# Altium PCB bms_afe_tester-1_1.PcbDoc (part 2 of 6)
Units mm, origin at the board's own origin, x right, y up, seen from the top; angles counter-clockwise.
Board outline 410 x 67 mm, 4 copper layers (L1, L2, L3, L4), stack 1.586 mm thick; 598 components, 356 nets, 1901 pads, 1542 vias.
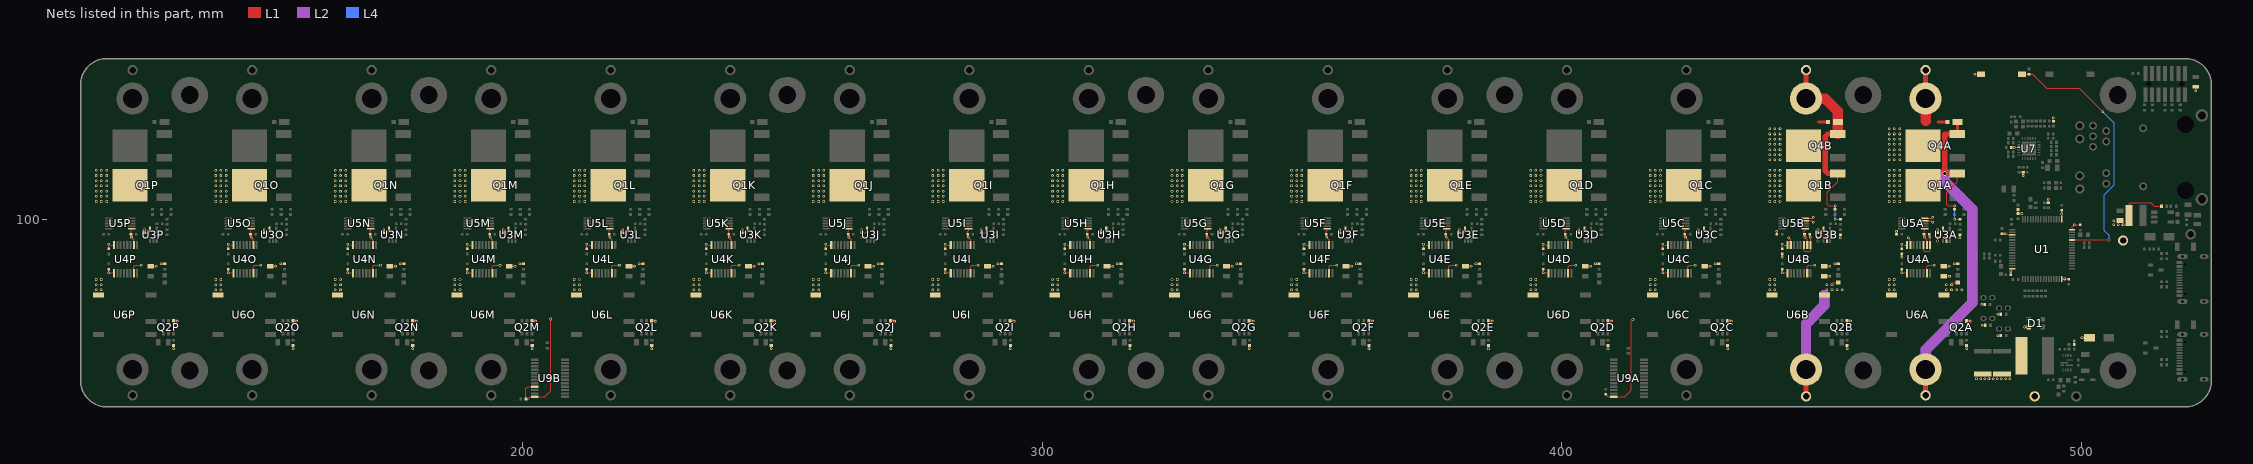
[diagram p4: the nets of this part, all layers, seen from the top]

## Components (designator, comment, footprint, x,y, rotation, side; value= is the part's Value field where it differs from the comment) (continued)
X3 "ABM11W-25.0000MHZ-8-D1X-T3" 4_SMD_2.0X1.6MM 488.1,118.4 r180 top

## Footprints (in the part's own frame and the unit in brackets; to place one, negate y for a bottom-side part, rotate by r counter-clockwise, add the part's x,y. Pads: shape width x height; smd on the part's side, far side on the other; paste and mask are expansions set on the pad)
3SOT23 [mm] "SOT23, 3-Leads, Body 3.0x2.6mm (max), Pitch 1.01mm, IPC High Density"
  rect 0.95x0.6 smd: 1(-1.025,0.95) 2(-1.025,-0.95) 3(1.025,0)
  silkscreen extent -1.17,-1.5 0.7,1.73, body extent -1.25,-1.5 1.25,1.5, height 1.01
4_SMD_2.0X1.6MM [mm]
  rect 0.75x0.7 smd: 1(-0.675,-0.5) 2(0.675,-0.5) 3(0.675,0.5) 4(-0.675,0.5)
  silkscreen extent -0.1,-0.8 0.1,0.8, body extent -1,-0.8 1,0.8, height 0.71
5SC70 [mm] "5SC70/SOT353-1/MO-203/SC-88A, 5-Leads, Body 2.2x2.4mm (max), Pitch 0.65mm, IPC High Density"
  rect 0.9x0.4 smd: 1(-1.1,0.65) 2(-1.1,0) 3(-1.1,-0.65) 4(1.1,-0.65) 5(1.1,0.65)
  silkscreen extent -1.14,-1.1 0.64,1.27, body extent -1.05,-1 1.05,1, height 0.95
5SOT23 [mm] "SOT23, 5-Leads, Body 2.9x2.8mm (max), Pitch 0.95mm, IPC High Density"
  rect 1.22x0.62 smd: 1(-1.61,0.95) 2(-1.61,0) 3(-1.61,-0.95) 4(1.61,-0.95) 5(1.61,0.95)
  silkscreen extent -1.27,-1.45 0.76,1.75, body extent -1.5,-1.5 1.5,1.5, height 1.46
6SOT23 [mm] "SOT23, 6-Leads, Body 2.9x2.8mm (max), Pitch 0.95mm, IPC High Density"
  rect 0.75x0.55 smd: 1(-1.225,0.95) 2(-1.225,0) 3(-1.225,-0.95) 4(1.225,-0.95) 5(1.225,0) 6(1.225,0.95)
  silkscreen extent -1.25,-1.45 0.63,1.5, body extent -1.5,-1.5 1.5,1.5, height 1.46
16SSOP635 [mm] "SOP, 16-Leads, Body 5.0x4.0mm (max), Pitch 0.64mm, IPC High Density"
  rect 1.55x0.4 smd: 1(-2.7,2.222) 2(-2.7,1.587) 3(-2.7,0.952) 4(-2.7,0.317) 5(-2.7,-0.318) 6(-2.7,-0.953) 7(-2.7,-1.588) 8(-2.7,-2.222) 9(2.7,-2.222) 10(2.7,-1.587) 11(2.7,-0.952) 12(2.7,-0.317) 13(2.7,0.318) 14(2.7,0.953) 15(2.7,1.588) 16(2.7,2.222)
  silkscreen extent -2.85,-2.5 1.6,3.05, body extent -3,-2.53 3,2.45, height 1.11
24QFN4E [mm] "QFN, 24-Leads, Body 4.1x4.1mm (max), Pitch 0.50mm, IPC High Density"
  oval 0.6x0.25 smd: 1(-1.95,1.25) 2(-1.95,0.75) 3(-1.95,0.25) 4(-1.95,-0.25) 5(-1.95,-0.75) 6(-1.95,-1.25) 13(1.95,-1.25) 14(1.95,-0.75) 15(1.95,-0.25) 16(1.95,0.25) 17(1.95,0.75) 18(1.95,1.25)
  oval 0.25x0.6 smd: 7(-1.25,-1.95) 8(-0.75,-1.95) 9(-0.25,-1.95) 10(0.25,-1.95) 11(0.75,-1.95) 12(1.25,-1.95) 19(1.25,1.95) 20(0.75,1.95) 21(0.25,1.95) 22(-0.25,1.95) 23(-0.75,1.95) 24(-1.25,1.95)
  rect 2.7x2.7 smd: EP(0,0)
  silkscreen extent -2.52,-2.05 2.05,2.05, body extent -2,-2 2,2, height 0.9
24TSSOP65 [mm] "TSOP, 24-Leads, Body 7.9x4.5mm (max), Pitch 0.65mm, IPC High Density"
  rect 1.5x0.45 smd: 1(-2.9,3.575) 2(-2.9,2.925) 3(-2.9,2.275) 4(-2.9,1.625) 5(-2.9,0.975) 6(-2.9,0.325) 7(-2.9,-0.325) 8(-2.9,-0.975) 9(-2.9,-1.625) 10(-2.9,-2.275) 11(-2.9,-2.925) 12(-2.9,-3.575) 13(2.9,-3.575) 14(2.9,-2.925) 15(2.9,-2.275) 16(2.9,-1.625) 17(2.9,-0.975) 18(2.9,-0.325) 19(2.9,0.325) 20(2.9,0.975) 21(2.9,1.625) 22(2.9,2.275) 23(2.9,2.925) 24(2.9,3.575)
  silkscreen extent -3.1,-3.9 1.9,4.3, body extent -3.2,-3.9 3.2,3.9, height 1.13
64TQFP10 [mm] "TSQFP, 64-Leads, Body 12.0x12.0mm (max), Pitch 0.50mm, IPC High Density"
  rect 1.2x0.3 smd: 1(-5.75,3.75) 2(-5.75,3.25) 3(-5.75,2.75) 4(-5.75,2.25) 5(-5.75,1.75) 6(-5.75,1.25) 7(-5.75,0.75) 8(-5.75,0.25) 9(-5.75,-0.25) 10(-5.75,-0.75) 11(-5.75,-1.25) 12(-5.75,-1.75) 13(-5.75,-2.25) 14(-5.75,-2.75) 15(-5.75,-3.25) 16(-5.75,-3.75) 33(5.75,-3.75) 34(5.75,-3.25) 35(5.75,-2.75) 36(5.75,-2.25) 37(5.75,-1.75) 38(5.75,-1.25) 39(5.75,-0.75) 40(5.75,-0.25) 41(5.75,0.25) 42(5.75,0.75) 43(5.75,1.25) 44(5.75,1.75) 45(5.75,2.25) 46(5.75,2.75) 47(5.75,3.25) 48(5.75,3.75)
  rect 0.3x1.2 smd: 17(-3.75,-5.75) 18(-3.25,-5.75) 19(-2.75,-5.75) 20(-2.25,-5.75) 21(-1.75,-5.75) 22(-1.25,-5.75) 23(-0.75,-5.75) 24(-0.25,-5.75) 25(0.25,-5.75) 26(0.75,-5.75) 27(1.25,-5.75) 28(1.75,-5.75) 29(2.25,-5.75) 30(2.75,-5.75) 31(3.25,-5.75) 32(3.75,-5.75) 49(3.75,5.75) 50(3.25,5.75) 51(2.75,5.75) 52(2.25,5.75) 53(1.75,5.75) 54(1.25,5.75) 55(0.75,5.75) 56(0.25,5.75) 57(-0.25,5.75) 58(-0.75,5.75) 59(-1.25,5.75) 60(-1.75,5.75) 61(-2.25,5.75) 62(-2.75,5.75) 63(-3.25,5.75) 64(-3.75,5.75)
  silkscreen extent -5.9,-5 5,5, body extent -6.01,-6.01 6.01,6.01, height 1.35
BELFUSE_0826-1L1T-57-F [mil]
  rect 0x0 hole 128: 0(-250,0) 0(250,0)
  round 60 hole 35: 1(-200,-600) 2(-120,-600) 5(120,-600) 6(200,-600) 7(-240,-700) 8(-160,-700) 9(-80,-700) 10(-220,-320) 11(220,-320)
  round 70 hole 40: 12(-240,-800) 13(-140,-800) 14(140,-800) 15(240,-800)
  round 94.49 hole 62: SHLD(-317.5,125) SHLD(317.5,125)
  silkscreen extent -318,-799 318,-80, body extent -374,-858 374,457, height 587
BOURNS_SRP7030CA [mm]
  rect 2.3x7.2 smd: 1(-2.55,0) 2(2.55,0)
  silkscreen extent -3.8,-3.9 3.8,3.9, body extent -3.8,-3.9 3.8,3.9, height 3
C0402 [mm]
  rect 0.5x0.5 smd: 1(-0.5,0) 2(0.5,0)
  silkscreen extent -0.13,-0.25 0.13,0.25, body extent -0.5,-0.25 0.5,0.25, height 0.6
C0603 [mm]
  rect 0.8x0.8 smd: 1(-0.75,0) 2(0.75,0)
  silkscreen extent -0.23,-0.4 0.23,0.4, body extent -0.8,-0.4 0.8,0.4, height 1
C0805 [mm]
  rect 0.9x1.3 smd: 1(-0.95,0) 2(0.95,0)
  silkscreen extent -0.38,-0.63 0.38,0.63, body extent -1,-0.63 1,0.63, height 1.45
C1206 [mm]
  rect 0.9x1.6 smd: 1(-1.55,0) 2(1.55,0)
  silkscreen extent -0.98,-0.8 0.97,0.8, body extent -1.6,-0.8 1.6,0.8, height 1.9
C1812 [mm]
  rect 0.9x3.4 smd: 1(-2.2,0) 2(2.2,0)
  silkscreen extent -1.63,-1.6 1.62,1.6, body extent -2.25,-1.6 2.25,1.6, height 3.5
CONN_USBC_TYPE-C-31-M-12 [mm] "USB 2.0 12P USB-C connector"
  oval 0.9x2 hole 0.6 slot 1.7 at 90 deg: 0(-4.325,6.29) 0(4.325,6.29)
  oval 0.9x1.7 hole 0.6 slot 1.4 at 90 deg: 0(-4.325,2.11) 0(4.325,2.11)
  rect 0.6x1.14 smd: A1(-3.2,6.86) A4(-2.4,6.86) B1(3.2,6.86) B4(2.4,6.86)
  rect 0.3x1.14 smd: A5(-1.25,6.86) A6(-0.25,6.86) A7(0.25,6.86) A8(1.25,6.86) B5(1.75,6.86) B6(0.75,6.86) B7(-0.75,6.86) B8(-1.75,6.86)
  round 0 hole 0.6: GP(-2.89,5.79) GP(2.89,5.79)
  silkscreen extent -4.5,3.3 4.5,7.8, body extent -4.47,-0.46 4.47,7.44, height 3.22
ESMP [mm]
  rect 0.8x0.8 smd: 1(0.65,0)
  rect 2x1.1 smd: 2(-1.25,0)
  silkscreen extent -2.44,-0.6 0.75,0.6, body extent -1.58,-0.65 0.92,0.65, height 0.68
FB0402 [mm]
  rect 0.55x0.55 smd: 1(-0.45,0) 2(0.45,0)
  silkscreen extent -0.05,-0.28 0.05,0.28, body extent -0.5,-0.25 0.5,0.25, height 0.65
FB0805 [mm]
  rect 0.81x1.4 smd: 1(-0.85,0) 2(0.85,0)
  silkscreen extent -0.33,-0.62 0.33,0.63, body extent -1,-0.63 1,0.63, height 1.1
HALO_DC21 [mm]
  rect 2.1x1 smd: 1(-5.05,3.81) 2(-5.05,1.27) 4(-5.05,-3.81) 5(5.05,-3.81) 8(5.05,3.81)
  silkscreen extent -5.6,-6.35 5.6,6.35, body extent -5.7,-6.35 5.7,6.35, height 7.25
HOLE_M3 [mm]
  round 7 hole 3.4: 1(0,0)
LED_0603P_GREEN [mm]
  rect 0.8x0.85 smd: 1(0.7,0) 2(-0.7,0)
  silkscreen extent -1.4,-0.33 0.1,0.33, body extent -0.81,-0.4 0.81,0.4, height 0.6
LED_RGB_SMD3528-4P [mm]
  rect 0.9x0.9 smd: 1(1.35,-0.75) 2(-1.35,-0.75) 3(1.35,0.75) 4(-1.35,0.75)
  silkscreen extent -1.6,-1.5 2.3,1.5, body extent -1.75,-1.4 1.75,1.4, height 1.9
R0402 [mm]
  rect 0.5x0.6 smd: 1(-0.5,0) 2(0.5,0)
  silkscreen extent -0.13,-0.25 0.13,0.25, body extent -0.5,-0.25 0.5,0.25, height 0.5
R0805 [mm]
  rect 0.7x1.3 smd: 1(-0.95,0) 2(0.95,0)
  silkscreen extent -0.48,-0.63 0.48,0.63, body extent -1,-0.63 1,0.63, height 0.75
SAMTEC_FTSH-107-01-L-DV-K-A [mil]
  rect 0x0 hole 40 unplated: 0(-125,0) 0(125,0)
  rect 29x110 smd: 1(-150,-80) 2(-150,80) 3(-100,-80) 4(-100,80) 5(-50,-80) 6(-50,80) 7(0,-80) 8(0,80) 9(50,-80) 10(50,80) 11(100,-80) 12(100,80) 13(150,-80) 14(150,80)
  silkscreen extent -201,-106 177,59, body extent -175,-115 175,115, height 242
SINHOO_SMTSO20100CTJ [mm]
  round 6.2 smd: 1(0,0)
  round 5 hole 3.7: 1(0,0)
  body extent -2.78,-2.76 2.78,2.78, height 10.01
SMA [mm] "Molded Diode, 2-Leads, Body 4.3x2.6mm, IPC High Density"
  rect 2.1x1.45 smd: 1(-1.85,0) 2(1.85,0)
  silkscreen extent -2.3,-1.5 3.08,1.5, body extent -2.6,-1.3 2.6,1.3, height 2.4
SMD-4.1x4.1x2.0 [mm]
  rect 1.4x4.1 smd: 1(-1.35,0) 2(1.35,0)
  silkscreen extent -0.5,-2 0.5,2, body extent -2,-2 2,2, height 2
SOD323 [mm] "Molded Diode, 2-Leads, Body 1.7x1.3mm, IPC High Density"
  rect 1.06x0.54 smd: 1(1.07,0) 2(-1.07,0)
  silkscreen extent -1.31,-0.75 0.9,0.75, body extent -1.35,-0.67 1.35,0.68, height 0.78
SWITCH_TS-1092S-B3D2-G [mm]
  rect 1.5x1 smd: 1(-3.95,0) 2(3.95,0)
  silkscreen extent -3.05,-1.8 3.05,1.8, body extent -3.95,-1.8 3.95,1.8, height 2.5
TI_DGS [mm]
  rect 1.45x0.3 smd: 1(-2.2,1) 2(-2.2,0.5) 3(-2.2,0) 4(-2.2,-0.5) 5(-2.2,-1) 6(2.2,-1) 7(2.2,-0.5) 8(2.2,0) 9(2.2,0.5) 10(2.2,1)
  silkscreen extent -2.3,-1.5 1.5,1.6, body extent -2.43,-1.5 2.49,1.5, height 1.11
TI_RJN [mm]
  rect 1.4x0.25 smd: 1(-0.5,0.5) 2(-0.5,-0.5) 7(0.5,0)
  rect 0.25x0.6 smd: 3(-0.75,-1.4) 4(-0.25,-1.4) 5(0.25,-1.4) 6(0.75,-1.4) 9(0.75,1.4) 10(0.25,1.4) 11(-0.25,1.4) 12(-0.75,1.4)
  rect 0.6x0.25 smd: 8(0.9,0.5)
  silkscreen extent -1.44,-1.4 1.12,1.4, body extent -1,-1.5 1,1.5, height 1.01
TO-252-3 [mm]
  rect 1.5x3 smd: 1(-2.286,-6.6) 3(2.286,-6.6)
  rect 6.25x6.8 smd: 4(0,0)
  silkscreen extent -3.4,-8.3 3.4,3.6, body extent -3.3,-7.35 3.3,2.55, height 2.51
TP_GRABBY [mm]
  rrect100% 1.2x1 hole 0.65 slot 0.9 at 0 deg: 1(-0.856,0) 1(0.844,0)
  silkscreen extent -1.65,-0.69 1.62,0.69
TP_RH-5000 [mm]
  round 2 hole 1.25: 1(0,0)
  silkscreen extent -1.25,-1.25 1.25,1.25, body extent -1.25,-1.24 1.25,1.24, height 4.59
TP_RH-5001 [mm]
  round 2 hole 1.25: 1(0,0)
  silkscreen extent -1.25,-1.25 1.25,1.25, body extent -1.25,-1.24 1.25,1.24, height 4.59

## Part data
C1 C2: Capacitance="2.2 µF", Dielectric=X7R, Manufacturer="Murata Electronics", Package=0603, Voltage Rating="6.3 V", ComponentLink1Description=Datasheet, ComponentLink1URL=https://wmsc.lcsc.com/wmsc/upload/file/pdf/v2/lcsc/1810311130_Murata-Electronics-GCM188R70J225KE22D_C126582.pdf, Manufacturer Part Number=GCM188R70J225KE22D, Supplier 2=LCSC, Supplier Part Number 2=C126582
C3 C4 C5 C6A C6B C7 C8 C9 C20A C20B C20C C20D C20E C20F C20G C20H C20I C20J C20K C20L C20M C20N C20O C20P C24A C24B C24C C24D C24E C24F C24G C24H C24I C24J C24K C24L C24M C24N C24O C24P C25A C25B C25C C25D C25E C25F C25G C25H C25I C25J C25K C25L C25M C25N C25O C25P C26A C26B C26C C26D C26E C26F C26G C26H C26I C26J C26K C26L C26M C26N C26O C26P C27A C27B C27C C27D C27E C27F C27G C27H C27I C27J C27K C27L C27M C27N C27O C27P C28 C30 C36 C39 C49 C56: Capacitance="100 nF", Dielectric=X7R, Manufacturer="Samsung Electro-Mechanics", Package=0402, Voltage Rating="50 V", ComponentLink1Description=Datasheet, ComponentLink1URL=https://wmsc.lcsc.com/wmsc/upload/file/pdf/v2/lcsc/2304140030_Samsung-Electro-Mechanics-CL05B104KB54PNC_C307331.pdf, Manufacturer Part Number=CL05B104KB54PNC, Supplier 2=LCSC, Supplier Part Number 2=C307331
C10 C12 C18 C31 C47 C50: Capacitance="1 µF", Dielectric=X7R, Manufacturer="Samsung Electro-Mechanics", Package=0603, Voltage Rating="25 V", ComponentLink1Description=Datasheet, ComponentLink1URL=https://wmsc.lcsc.com/wmsc/upload/file/pdf/v2/lcsc/2304140030_Samsung-Electro-Mechanics-CL10B105KA8NNNC_C29936.pdf, Manufacturer Part Number=CL10B105KA8NNNC, Supplier 2=LCSC, Supplier Part Number 2=C29936
C13 C48: Capacitance="10 µF", Dielectric=X7R, Manufacturer=YAGEO, Package=0805, Voltage Rating="6.3 V", ComponentLink1Description=Datasheet, ComponentLink1URL=https://wmsc.lcsc.com/wmsc/upload/file/pdf/v2/lcsc/2409272300_YAGEO-CC0805KKX7R5BB106_C527225.pdf, Manufacturer Part Number=CC0805KKX7R5BB106, Supplier 2=LCSC, Supplier Part Number 2=C527225
C14 C51: Capacitance="27 pF", Dielectric=NP0, Manufacturer=YAGEO, Package=0402, Voltage Rating="50 V", ComponentLink1Description=Datasheet, ComponentLink1URL=https://wmsc.lcsc.com/wmsc/upload/file/pdf/v2/lcsc/2304140030_YAGEO-CC0402JRNPO9BN270_C107002.pdf, Manufacturer Part Number=CC0402JRNPO9BN270, Supplier 2=LCSC, Supplier Part Number 2=C107002
C15 C16: Capacitance="6 pF", Dielectric=NP0, Manufacturer=YAGEO, Package=0402, Voltage Rating="50 V", ComponentLink1Description=Datasheet, ComponentLink1URL=https://wmsc.lcsc.com/wmsc/upload/file/pdf/v2/lcsc/2007101237_YAGEO-CC0402CRNPO9BN6R0_C700515.pdf, Manufacturer Part Number=CC0402CRNPO9BN6R0, Supplier 2=LCSC, Supplier Part Number 2=C700515
C17 C19 C22A C22B C22C C22D C22E C22F C22G C22H C22I C22J C22K C22L C22M C22N C22O C22P C23A C23B C23C C23D C23E C23F C23G C23H C23I C23J C23K C23L C23M C23N C23O C23P: Capacitance="10 µF", Dielectric=X7R, Manufacturer="Samsung Electro-Mechanics", Package=0805, Voltage Rating="16 V", ComponentLink1Description=Datasheet, ComponentLink1URL=https://wmsc.lcsc.com/wmsc/upload/file/pdf/v2/lcsc/2304140030_Samsung-Electro-Mechanics-CL21B106KOQNNNE_C95841.pdf, Manufacturer Part Number=CL21B106KOQNNNE, Supplier 2=LCSC, Supplier Part Number 2=C95841
C21A C21B C21C C21D C21E C21F C21G C21H C21I C21J C21K C21L C21M C21N C21O C21P: Capacitance="68 pF", Dielectric=C0G, Manufacturer=KEMET, Package=0402, Voltage Rating="25 V", ComponentLink1Description=Datasheet, ComponentLink1URL=https://wmsc.lcsc.com/wmsc/upload/file/pdf/v2/lcsc/2401181509_KEMET-CBR04C680F3GAC_C3831342.pdf, Manufacturer Part Number=CBR04C680F3GAC, Supplier 2=LCSC, Supplier Part Number 2=C3831342
C29 C80A C80B: Capacitance="10 µF", Dielectric=X7R, Manufacturer="Samsung Electro-Mechanics", Package=1206, Voltage Rating="50 V", ComponentLink1Description=Datasheet, ComponentLink1URL=https://wmsc.lcsc.com/wmsc/upload/file/pdf/v2/lcsc/1810221111_Samsung-Electro-Mechanics-CL31B106KBHNNNE_C89632.pdf, Manufacturer Part Number=CL31B106KBHNNNE, Supplier 2=LCSC, Supplier Part Number 2=C89632
C32 C33: Capacitance="33 µF", Dielectric=X7R, Manufacturer=TDK, Package=1812, Voltage Rating="16 V", ComponentLink1Description=Datasheet, ComponentLink1URL=https://wmsc.lcsc.com/wmsc/upload/file/pdf/v2/lcsc/2304140030_TDK-C4532X7R1C336MT000N_C342604.pdf, Manufacturer Part Number=C4532X7R1C336MT000N, Supplier 2=LCSC, Supplier Part Number 2=C342604
C34A C34B C35A C35B: Capacitance="330 pF", Dielectric=C0G, Manufacturer="Samsung Electro-Mechanics", Package=0402, Voltage Rating="50 V", ComponentLink1Description=Datasheet, ComponentLink1URL=https://wmsc.lcsc.com/wmsc/upload/file/pdf/v2/lcsc/2304140030_Samsung-Electro-Mechanics-CL05C331JB5NNNC_C13533.pdf, Manufacturer Part Number=CL05C331JB5NNNC, Supplier 2=LCSC, Supplier Part Number 2=C13533
C52 C53: Capacitance="10 pF", Dielectric=C0G, Manufacturer="Samsung Electro-Mechanics", Package=0402, Voltage Rating="50 V", ComponentLink1Description=Datasheet, ComponentLink1URL=https://wmsc.lcsc.com/wmsc/upload/file/pdf/v2/lcsc/2304140030_Samsung-Electro-Mechanics-CL05C100JB5NNNC_C32949.pdf, Manufacturer Part Number=CL05C100JB5NNNC, Supplier 2=LCSC, Supplier Part Number 2=C32949
D1: "LED Multi-Color Chip Red/Green/Blue 4-Pin PLCC T/R", LED Color=RGB, Manufacturer=XINGLIGHT, Supplier Part Number 1=5962-XL-3528RGBW-HMTR-ND, ComponentLink1Description=Datasheet, ComponentLink1URL=https://mm.digikey.com/Volume0/opasdata/d220001/medias/docus/8903/XL-3528RGBW-HM.pdf, Manufacturer Part Number=XL-3528RGBW-HM, Supplier 1=DigiKey, Supplier 2=LCSC, Supplier Part Number 2=C2843813
D2 D6: "Rectifier Diode, Schottky, 1 Phase, 1 Element, 3A, 40V V(RRM), Silicon", Current="3 A", Manufacturer=Diodes, Supplier Part Number 1=B340A-FDICT-ND, ComponentLink1Description=Datasheet, ComponentLink1URL=https://www.diodes.com/assets/Datasheets/ds30891.pdf, Diode Type=Schottky, Manufacturer Part Number=B340A-13-F, Supplier 1=DigiKey, Supplier 2=LCSC, Supplier 3=Mouser, Supplier Part Number 2=C85098, Supplier Part Number 3=621-B340A-F, Vr="40 V"
D4A D4B D4C D4D D4E D4F D4G D4H D4I D4J D4K D4L D4M D4N D4O D4P: "LED GREEN CLEAR 0603 SMD", LED Color=Green, Manufacturer="Lite-On Inc", Supplier Part Number 1=160-1183-1-ND, ComponentLink1Description=Datasheet, ComponentLink1URL=https://static.chipdip.ru/lib/459/DOC011459654.pdf, If="20 mA", Manufacturer Part Number=LTST-C190GKT, Supplier 1=DigiKey, Supplier 2=LCSC, Supplier 3=Mouser, Supplier Part Number 2=C125093, Supplier Part Number 3=859-LTST-C190GKT, Vf="2.0 V"
D5: "Zener Diode 5.1 V 300 mW ±2% Surface Mount SOD-323", Current="58.8 mA", Manufacturer=onsemi, Supplier Part Number 1=SZMM3Z5V1ST1GOSCT-ND, ComponentLink1Description=Datasheet, ComponentLink1URL=https://www.onsemi.com/pdf/datasheet/mm3z2v4st1-d.pdf, Diode Type=Zener, Manufacturer Part Number=SZMM3Z5V1ST1G, Supplier 1=DigiKey, Supplier 2=LCSC, Supplier 3=Mouser, Supplier Part Number 2=C152524, Supplier Part Number 3=863-SZMM3Z5V1ST1G, Vr="5.1 V"
D8A D8B D8C D8D D8E D8F D8G D8H D8I D8J D8K D8L D8M D8N D8O D8P: "DIODE SCHOTTKY 20V 2A MICROSMP", Current="2 A", Manufacturer="Vishay Semiconductor Diodes Division", Supplier Part Number 1=MSS2P2-M3/89AGICT-ND, ComponentLink1Description=Datasheet, ComponentLink1URL=http://www.vishay.com/docs/89054/mss2p3.pdf, Diode Type=Schottky, Manufacturer Part Number=MSS2P2-M3/89A, Supplier 1=DigiKey, Supplier 2=LCSC, Supplier 3=Mouser, Supplier Part Number 2=C2978531, Supplier Part Number 3=625-MSS2P2-M3, Vr="20 V"
D17A D17B: "DIODE ESD USB SOT-23", Capacitance (pF)=0.7, Manufacturer="Nexperia USA Inc.", Min Breakdown Voltage="4.2 V", Supplier Part Number 1=1727-PESD2USB3UX-CT-ND, ComponentLink1Description=Datasheet, ComponentLink1URL=https://assets.nexperia.com/documents/data-sheet/PESD2USB3UX-T.pdf, Manufacturer Part Number=PESD2USB3UX, Polarity=Unidirectional, Standoff (V)=3.3, Supplier 1=DigiKey, Supplier 2=LCSC, Supplier 3=Mouser, Supplier Part Number 2=C3708426, Supplier Part Number 3=771-PESD2USB3UX-TR
FB1 FB3: Current Rating (mA)=900, Manufacturer="Murata Electronics", Package=0402, ComponentLink1Description=Datasheet, ComponentLink1URL=https://wmsc.lcsc.com/wmsc/upload/file/pdf/v2/lcsc/2304140030_Murata-Electronics-BLM15PX601SN1D_C160977.pdf, DCR (mOhms)=230, Manufacturer Part Number=BLM15PX601SN1D, Supplier 2=LCSC, Supplier Part Number 2=C160977, Z @ 100 MHz=600
FB2: Current Rating (mA)=1500, Manufacturer=TDK, Package=0805, ComponentLink1Description=Datasheet, ComponentLink1URL=https://wmsc.lcsc.com/wmsc/upload/file/pdf/v2/lcsc/2304140030_TDK-MPZ2012S102AT000_C76817.pdf, DCR (mOhms)=150, Manufacturer Part Number=MPZ2012S102AT000, Supplier 2=LCSC, Supplier Part Number 2=C76817, Z @ 100 MHz=1000
H1 H2 H3 H4 H5 H6 H7 H8 H9 H10 H11 H12 H13 H14 H15 H16 H17 H18 H19 H20 H21 H22 H23 H24 H25 H26 H27 H28 H29 H30 H31 H32: "Standoff M2 x 0.4, tin-plated, 10 mm height", Manufacturer=Sinhoo, ComponentLink1Description=Catalog, ComponentLink1URL=https://www.lcsc.com/datasheet/C2928171.pdf, Manufacturer Part Number=SMTSO20100CTJ, Supplier 2=LCSC, Supplier Part Number 2=C2928171
J1: "Connector Header Surface Mount 14 position 0.050\" (1.27mm)", Manufacturer=Samtec, Supplier Part Number 1=FTSH-107-01-L-DV-K-A-ND, ComponentLink1Description=Datasheet, ComponentLink1URL=https://mm.digikey.com/Volume0/opasdata/d220001/medias/docus/6209/ftsh-1xx-xx-xxx-dv-xxx-xxx-x-xx-mkt.pdf, Manufacturer Part Number=FTSH-107-01-L-DV-K-A, Supplier 1=DigiKey, Supplier 2=LCSC, Supplier 3=Mouser, Supplier Part Number 2=C5563894, Supplier Part Number 3=200-FTSH10701LDVKA
J2: "CONN MAGJACK 1PORT 100 BASE-T", Manufacturer="Bel Fuse Inc", Supplier Part Number 1=507-1431-ND, ComponentLink1Description=Datasheet, ComponentLink1URL=https://www.belfuse.com/resources/drawings/magneticsolutions/dr-mag-0826-1l1t-57-f.pdf, Manufacturer Part Number=0826-1L1T-57-F, Supplier 1=DigiKey, Supplier 2=LCSC, Supplier 3=Mouser, Supplier Part Number 2=C3179913, Supplier Part Number 3=530-0826-1L1T-57-F
J11A J11B: "5A 1 16P Female Type-C SMD USB Connectors ROHS", Manufacturer="HRO Electronics", ComponentLink1Description="Product page", ComponentLink1URL=https://en.krhro.com/Product-Details/726.html, ComponentLink2Description=Drawing, ComponentLink2URL=https://omo-oss-file.thefastfile.com/portal-saas/new2023011311465142457/cms/file/95f41c83-14fa-41cb-9f86-8d6a717317e5.pdf, Manufacturer Part Number=TYPE-C-31-M-12, Supplier 2=LCSC, Supplier Part Number 2=C165948
L1: "4.7 µH SMD power inductor", Current Rating (mA)=5000, Inductance (µH)=4.7, Manufacturer=cjiang, ComponentLink1Description=Datasheet, ComponentLink1URL=https://www.lcsc.com/datasheet/C39676072.pdf, DCR (mOhms)=58, Manufacturer Part Number=FTC404020S4R7MGCA, Supplier 2=LCSC, Supplier Part Number 2=C39676072
L2: "2.2 µH shielded power inductor", Current Rating (mA)=13000, Inductance (µH)=2.2, Manufacturer=BOURNS, Supplier Part Number 1=SRP7030CA-2R2MCT-ND, ComponentLink1Description=Datasheet, ComponentLink1URL=https://www.bourns.com/docs/product-datasheets/SRP7030CA.pdf, DCR (mOhms)=13.7, Manufacturer Part Number=SRP7030CA-2R2M, Supplier 1=DigiKey, Supplier 2=LCSC, Supplier 3=Mouser, Supplier Part Number 2=C1332137, Supplier Part Number 3=652-SRP7030CA-2R2M
Q1A Q1B Q1C Q1D Q1E Q1F Q1G Q1H Q1I Q1J Q1K Q1L Q1M Q1N Q1O Q1P: "NPN power transistor, 30 V, 5 A, low VCE(sat), TO-252-3", Current="5 A", Manufacturer="ROHM Semiconductor", Supplier Part Number 1=2SCR572D3TL1CT-ND, Voltage="30 V", ComponentLink1Description=Datasheet, ComponentLink1URL=https://fscdn.rohm.com/en/products/databook/datasheet/discrete/transistor/bipolar/2scr572d3tl1-e.pdf, Manufacturer Part Number=2SCR572D3TL1, Polarity=NPN, Supplier 1=DigiKey, Supplier 2=LCSC, Supplier 3=Mouser, Supplier Part Number 2=C3018572, Supplier Part Number 3=755-2SCR572D3TL1
Q2A Q2B Q2C Q2D Q2E Q2F Q2G Q2H Q2I Q2J Q2K Q2L Q2M Q2N Q2O Q2P: "MOSFET P-CH 20V 4.5A SSOT-6", Current="4.5 A", Manufacturer=onsemi, Supplier Part Number 1=FDC638PCT-ND, Voltage="20 V", Channel Type=P-channel, ComponentLink1Description=Datasheet, ComponentLink1URL=https://www.onsemi.com/pdf/datasheet/fdc638p-d.pdf, Manufacturer Part Number=FDC638P, Supplier 1=DigiKey, Supplier 2=LCSC, Supplier 3=Mouser, Supplier Part Number 2=C241772, Supplier Part Number 3=512-FDC638P
Q4A Q4B Q4C Q4D Q4E Q4F Q4G Q4H Q4I Q4J Q4K Q4L Q4M Q4N Q4O Q4P: "PNP power transistor, 30 V, 5 A, low VCE(sat), TO-252-3", Current="5 A", Manufacturer="ROHM Semiconductor", Supplier Part Number 1=2SAR572D3TL1CT-ND, Voltage="30 V", ComponentLink1Description=Datasheet, ComponentLink1URL=https://fscdn.rohm.com/en/products/databook/datasheet/discrete/transistor/bipolar/2sar572d3tl1-e.pdf, Manufacturer Part Number=2SAR572D3TL1, Polarity=PNP, Supplier 1=DigiKey, Supplier 2=LCSC, Supplier 3=Mouser, Supplier Part Number 2=C5336541, Supplier Part Number 3=755-2SAR572D3TL1
R1 R8 R51: Manufacturer=FOJAN, Package=0402, Power Rating (mW)=62.5, Temperature Coefficient=±100ppm/?, Tolerance=1%, ComponentLink1Description=Datasheet, Supplier 2=LCSC
  R1: ComponentLink1URL=https://datasheet.lcsc.com/lcsc/2308241947_FOJAN-FRC0402F2670TS_C2998075.pdf, Manufacturer Part Number=FRC0402F2670TS, Supplier Part Number 2=C2998075
  R8: ComponentLink1URL=https://datasheet.lcsc.com/lcsc/2308241947_FOJAN-FRC0402F4532TS_C2933099.pdf, Manufacturer Part Number=FRC0402F4532TS, Supplier Part Number 2=C2933099
  R51: ComponentLink1URL=https://datasheet.lcsc.com/lcsc/2308241009_FOJAN-FRC0402F8202TS_C2909388.pdf, Manufacturer Part Number=FRC0402F8202TS, Supplier Part Number 2=C2909388
R2: Manufacturer=RALEC, Package=0402, Power Rating (mW)=62.5, Temperature Coefficient=±100ppm/?, Tolerance=1%, ComponentLink1Description=Datasheet, ComponentLink1URL=https://wmsc.lcsc.com/wmsc/upload/file/pdf/v2/lcsc/2304140030_RALEC-RTT029760FTH_C11710.pdf, Manufacturer Part Number=RTT029760FTH, Supplier 2=LCSC, Supplier Part Number 2=C11710
R3 R4 R6 R22 R26 R28 R29 R31 R32 R33 R35 R36 R37 R38 R40 R41 R46A R46B R81 R82 R91 R92 R93: Manufacturer="Vishay Intertech", Package=0402, Power Rating (mW)=63, Temperature Coefficient=±100ppm/?, Tolerance=1%, ComponentLink1Description=Datasheet, ComponentLink1URL=https://wmsc.lcsc.com/wmsc/upload/file/pdf/v2/lcsc/2304140030_Vishay-Intertech-CRCW040233R0FKED_C242490.pdf, Manufacturer Part Number=CRCW040233R0FKED, Supplier 2=LCSC, Supplier Part Number 2=C242490
R5 R10 R12A R12B R13A R13B R14A R14B R14C R14D R14E R14F R14G R14H R14I R14J R14K R14L R14M R14N R14O R14P R15 R21 R24 R25 R27 R30 R34 R39 R42A R42B R42C R42D R42E R42F R42G R42H R42I R42J R42K R42L R42M R42N R42O R42P R44A R44B R44C R44D R44E R44F R44G R44H R44I R44J R44K R44L R44M R44N R44O R44P R45 R49 R50 R52 R53A R53B R53C R53D R53E R53F R53G R53H R53I R53J R53K R53L R53M R53N R53O R53P R54 R55A R55B R55C R55D R55E R55F R55G R55H R55I R55J R55K R55L R55M R55N R55O R55P R56 R83 R87 R88 R89 R90 R95 R96 R97 R98: Manufacturer="UNI-ROYAL(Uniroyal Elec)", Package=0402, Power Rating (mW)=62.5, Temperature Coefficient=±100ppm/?, Tolerance=1%, ComponentLink1Description=Datasheet, Supplier 2=LCSC
  R5 R45: ComponentLink1URL=https://wmsc.lcsc.com/wmsc/upload/file/pdf/v2/lcsc/2206010100_UNI-ROYAL-Uniroyal-Elec-0402WGF1003TCE_C25741.pdf, Manufacturer Part Number=0402WGF1003TCE, Supplier Part Number 2=C25741
  R10 R14A R14B R14C R14D R14E R14F R14G R14H R14I R14J R14K R14L R14M R14N R14O R14P R30 R44A R44B R44C R44D R44E R44F R44G R44H R44I R44J R44K R44L R44M R44N R44O R44P R53A R53B R53C R53D R53E R53F R53G R53H R53I R53J R53K R53L R53M R53N R53O R53P R83 R95 R98: ComponentLink1URL=https://wmsc.lcsc.com/wmsc/upload/file/pdf/v2/lcsc/2206010100_UNI-ROYAL-Uniroyal-Elec-0402WGF1002TCE_C25744.pdf, Manufacturer Part Number=0402WGF1002TCE, Supplier Part Number 2=C25744
  R12A R12B R13A R13B: ComponentLink1URL=https://wmsc.lcsc.com/wmsc/upload/file/pdf/v2/lcsc/2206010045_UNI-ROYAL-Uniroyal-Elec-0402WGF5101TCE_C25905.pdf, Manufacturer Part Number=0402WGF5101TCE, Supplier Part Number 2=C25905
  R15 R50: ComponentLink1URL=https://wmsc.lcsc.com/wmsc/upload/file/pdf/v2/lcsc/2206010100_UNI-ROYAL-Uniroyal-Elec-0402WGF4702TCE_C25792.pdf, Manufacturer Part Number=0402WGF4702TCE, Supplier Part Number 2=C25792
  R21 R27 R34 R49 R52 R54: ComponentLink1URL=https://wmsc.lcsc.com/wmsc/upload/file/pdf/v2/lcsc/2206010045_UNI-ROYAL-Uniroyal-Elec-0402WGF1501TCE_C25867.pdf, Manufacturer Part Number=0402WGF1501TCE, Supplier Part Number 2=C25867
  R24: ComponentLink1URL=https://wmsc.lcsc.com/wmsc/upload/file/pdf/v2/lcsc/2206010100_UNI-ROYAL-Uniroyal-Elec-0402WGF1502TCE_C25756.pdf, Manufacturer Part Number=0402WGF1502TCE, Supplier Part Number 2=C25756
  R25: ComponentLink1URL=https://wmsc.lcsc.com/wmsc/upload/file/pdf/v2/lcsc/2206010100_UNI-ROYAL-Uniroyal-Elec-0402WGF1102TCE_C25749.pdf, Manufacturer Part Number=0402WGF1102TCE, Supplier Part Number 2=C25749
  R39 R96 R97: ComponentLink1URL=https://wmsc.lcsc.com/wmsc/upload/file/pdf/v2/lcsc/2206010216_UNI-ROYAL-Uniroyal-Elec-0402WGF1001TCE_C11702.pdf, Manufacturer Part Number=0402WGF1001TCE, Supplier Part Number 2=C11702
  R42A R42B R42C R42D R42E R42F R42G R42H R42I R42J R42K R42L R42M R42N R42O R42P R55A R55B R55C R55D R55E R55F R55G R55H R55I R55J R55K R55L R55M R55N R55O R55P: ComponentLink1URL=https://wmsc.lcsc.com/wmsc/upload/file/pdf/v2/lcsc/2205311900_UNI-ROYAL-Uniroyal-Elec-0402WGF220JTCE_C25092.pdf, Manufacturer Part Number=0402WGF220JTCE, Supplier Part Number 2=C25092
  R56: ComponentLink1URL=https://wmsc.lcsc.com/wmsc/upload/file/pdf/v2/lcsc/2206010230_UNI-ROYAL-Uniroyal-Elec-0402WGF4990TCE_C4125.pdf, Manufacturer Part Number=0402WGF4990TCE, Supplier Part Number 2=C4125
  R87 R88 R89 R90: ComponentLink1URL=https://wmsc.lcsc.com/wmsc/upload/file/pdf/v2/lcsc/2205311900_UNI-ROYAL-Uniroyal-Elec-0402WGF499JTCE_C25120.pdf, Manufacturer Part Number=0402WGF499JTCE, Supplier Part Number 2=C25120
R7: Manufacturer=PANASONIC, Package=0402, Power Rating (mW)=100, Temperature Coefficient=±100ppm/?, Tolerance=1%, ComponentLink1Description=Datasheet, ComponentLink1URL=https://wmsc.lcsc.com/wmsc/upload/file/pdf/v2/lcsc/1912111437_PANASONIC-ERJ2RKF1870X_C416489.pdf, Manufacturer Part Number=ERJ2RKF1870X, Supplier 2=LCSC, Supplier Part Number 2=C416489
R9 R11 R84: Manufacturer="Vishay Intertech", Package=0402, Power Rating (mW)=62.5, Temperature Coefficient=±100ppm/?, Tolerance=1%, ComponentLink1Description=Datasheet, ComponentLink1URL=https://datasheet.lcsc.com/lcsc/2304140030_Vishay-Intertech-CRCW04021R00FKEDC_C2077765.pdf, Manufacturer Part Number=CRCW04021R00FKEDC, Supplier 2=LCSC, Supplier Part Number 2=C2077765
R17A R17B R17C R17D R17E R17F R17G R17H R17I R17J R17K R17L R17M R17N R17O R17P R19A R19B R19C R19D R19E R19F R19G R19H R19I R19J R19K R19L R19M R19N R19O R19P: Manufacturer=PANASONIC, Package=0402, Power Rating (mW)=63, Temperature Coefficient=±25ppm/?, Tolerance=0.1%, ComponentLink1Description=Datasheet, ComponentLink1URL=https://wmsc.lcsc.com/wmsc/upload/file/pdf/v2/lcsc/2404151006_PANASONIC-ERA2AEB102X_C445596.pdf, Manufacturer Part Number=ERA2AEB102X, Supplier 2=LCSC, Supplier Part Number 2=C445596
R20: Manufacturer="Viking Tech", Package=0805, Power Rating (mW)=100, Temperature Coefficient=±25ppm/?, Tolerance=1%, ComponentLink1Description=Datasheet, ComponentLink1URL=https://wmsc.lcsc.com/wmsc/upload/file/pdf/v2/lcsc/2409280202_Viking-Tech-AR05FTC1000_C234699.pdf, Manufacturer Part Number=AR05FTC1000, Supplier 2=LCSC, Supplier Part Number 2=C234699
R86: Manufacturer=YAGEO, Package=0402, Power Rating (mW)=62.5, Temperature Coefficient=±100ppm/?, Tolerance=1%, ComponentLink1Description=Datasheet, ComponentLink1URL=https://wmsc.lcsc.com/wmsc/upload/file/pdf/v2/lcsc/2304140030_YAGEO-RC0402FR-0712K1L_C132157.pdf, Manufacturer Part Number=RC0402FR-0712K1L, Supplier 2=LCSC, Supplier Part Number 2=C132157
S2 S3: "SWITCH TACTILE SPST-NO", Manufacturer=Yuandi, ComponentLink1Description=Datasheet, ComponentLink1URL=https://www.lcsc.com/datasheet/lcsc_datasheet_2005071437_Yuandi-TS-1092S-B3D2-G_C520860.pdf, Manufacturer Part Number=TS-1092S-B3D2-G, Supplier 2=LCSC, Supplier Part Number 2=C520860
TP1 TP2 TP62 TP63: library part TEST_GRABBER, "EMBEDDED TEST POINT FOR SALEAE TEST CLIPS", Manufacturer Part Number=TEST_GRABBER
TP4 TP6 TP8 TP10 TP12 TP14 TP16 TP18 TP20 TP22 TP24 TP26 TP28 TP30 TP32 TP33 TP35 TP36: "Red through-hole PCB test point", Manufacturer=ronghe, ComponentLink1Description=Datasheet, ComponentLink1URL=https://datasheet.lcsc.com/lcsc/2307040929_ronghe-RH-5000_C5277086.pdf, Manufacturer Part Number=RH-5000, Supplier 2=LCSC, Supplier Part Number 2=C5277086
TP5 TP7 TP9 TP11 TP13 TP15 TP17 TP19 TP21 TP23 TP25 TP27 TP29 TP31 TP34 TP38 TP39 TP43: "Black through-hole PCB test point", Manufacturer=ronghe, ComponentLink1Description=Datasheet, ComponentLink1URL=https://datasheet.lcsc.com/lcsc/2307040929_ronghe-RH-5000_C5277086.pdf, Manufacturer Part Number=RH-5001, Supplier 2=LCSC, Supplier Part Number 2=C5199801
U1: "ARM® Cortex®-M33 STM32H5 Microcontroller IC 32-Bit 250MHz 1MB (1M x 8) FLASH 64-LQFP (10x10)", Manufacturer="ST Microelectronics", Supplier Part Number 1=497-STM32H563RGT6-ND, ComponentLink1Description=Datasheet, ComponentLink1URL=https://www.st.com/resource/en/datasheet/stm32h562ag.pdf, ComponentLink2Description="Reference Manual", ComponentLink2URL=https://www.st.com/resource/en/reference_manual/rm0481-stm32h52333xx-stm32h56263xx-and-stm32h573xx-armbased-32bit-mcus-stmicroelectronics.pdf, Manufacturer Part Number=STM32H563RGT6, Supplier 1=DigiKey, Supplier 2=LCSC, Supplier 3=Mouser, Supplier Part Number 2=C22470894, Supplier Part Number 3=511-STM32H563RGT6
U2: "1 A synchronous buck converter, 2–6 V input, 1.5 MHz, 0.6 V minimum output, 10 µA typical quiescent current, SOT-23-5", Manufacturer="XI'AN Aerosemi Tech", ComponentLink1Description=Datasheet, ComponentLink1URL=https://www.lcsc.com/datasheet/C22462728.pdf, Manufacturer Part Number=MT3406, Supplier 2=LCSC, Supplier Part Number 2=C22462728
U3A U3B U3C U3D U3E U3F U3G U3H U3I U3J U3K U3L U3M U3N U3O U3P: "Single 5 MHz rail-to-rail input/output operational amplifier, 15 V/µs slew rate, SC70-5", Manufacturer="Texas Instruments", Supplier Part Number 1=296-TLV9051IDCKRCT-ND, ComponentLink1Description=Datasheet, ComponentLink1URL=https://www.ti.com/lit/ds/symlink/tlv9051.pdf, Manufacturer Part Number=TLV9051IDCKR, Supplier 1=DigiKey, Supplier 2=LCSC, Supplier 3=Mouser, Supplier Part Number 2=C2873238, Supplier Part Number 3=595-TLV9051IDCKR
U4A U4B U4C U4D U4E U4F U4G U4H U4I U4J U4K U4L U4M U4N U4O U4P: "150Mbps 150kV/µs 2.5V~5.5V 2.5V~5.5V 3 3750 Low Level SSOP-16-150mil Digital Isolators ROHS", Manufacturer=Chipanalog, ComponentLink1Description=Datasheet, ComponentLink1URL=https://e.chipanalog.com/Public/Uploads/uploadfile/files/20250123/CAIS374xdatasheetVersion1.08en20241217.pdf, Manufacturer Part Number=CA-IS3741LB, Supplier 2=LCSC, Supplier Part Number 2=C3202820
U5A U5B U5C U5D U5E U5F U5G U5H U5I U5J U5K U5L U5M U5N U5O U5P: "16 Bit Digital to Analog Converter 1 10-VSSOP, zero output at startup", Manufacturer="Texas Instruments", Supplier Part Number 1=296-DAC80501ZDGSRCT-ND, ComponentLink1Description=Datasheet, ComponentLink1URL=https://www.ti.com/lit/ds/symlink/dac80501.pdf, Manufacturer Part Number=DAC80501ZDGSR, Supplier 1=DigiKey, Supplier 2=LCSC, Supplier 3=Mouser, Supplier Part Number 2=C1852033, Supplier Part Number 3=595-DAC80501ZDGSR
U6A U6B U6C U6D U6E U6F U6G U6H U6I U6J U6K U6L U6M U6N U6O U6P: "Isolated Module DC DC Converter 1 Output 5V 400mA 4.5V - 5.5V Input", Manufacturer="HALO Electronics, Inc.", Supplier Part Number 1=5843-DC21-V0505SLF-ND, ComponentLink1Description=Datasheet, ComponentLink1URL=https://www.haloelectronics.com/pdf/dc-converter-1w2w.pdf, Manufacturer Part Number=DC21-V0505SLF, Supplier 1=DigiKey, Supplier 3=Mouser, Supplier Part Number 3=493-DC21-V0505SLF
U7: "Ethernet Transceiver, PQCC24", Manufacturer=Microchip, Supplier Part Number 1=LAN8742AI-CZ-CT-ND, ComponentLink1Description=Datasheet, ComponentLink1URL=https://ww1.microchip.com/downloads/aemDocuments/documents/OTH/ProductDocuments/DataSheets/DS_LAN8742_00001989A.pdf, Manufacturer Part Number=LAN8742AI-CZ-TR, Supplier 1=DigiKey, Supplier 2=LCSC, Supplier 3=Mouser, Supplier Part Number 2=C153279, Supplier Part Number 3=579-LAN8742AI-CZ-TR
U8: "Buck Switching Regulator IC Positive Adjustable 0.6V 1 Output 8A 12-PowerVFQFN", Manufacturer="Texas Instruments", Supplier Part Number 1=296-TPS51386RJNRCT-ND, ComponentLink1Description=Datasheet, ComponentLink1URL=https://www.ti.com/lit/ds/symlink/tps51386.pdf, Manufacturer Part Number=TPS51386RJNR, Supplier 1=DigiKey, Supplier 2=LCSC, Supplier 3=Mouser, Supplier Part Number 2=C22388893, Supplier Part Number 3=595-TPS51386RJNR
U9A U9B: "16-bit I2C/SMBus I/O expander, 400 kHz, with interrupt and Agile I/O, TSSOP-24", Manufacturer="NXP Semiconductors", Supplier Part Number 1=568-9923-1-ND, ComponentLink1Description=Datasheet, ComponentLink1URL=https://www.nxp.com/docs/en/data-sheet/PCAL9535A.pdf, Manufacturer Part Number=PCAL9535APW,118, Supplier 1=DigiKey, Supplier 2=LCSC, Supplier 3=Mouser, Supplier Part Number 2=C2669683, Supplier Part Number 3=771-PCAL9535APW,118
X1: "CRYSTAL 16.0000MHZ 6PF SMD", Manufacturer=Murata, Supplier Part Number 1=490-18282-1-ND, ComponentLink1Description=Datasheet, ComponentLink1URL=https://www.murata.com/products/productdata/8801076543518/SPEC-XRCGB25M000F3A00R0.pdf, Manufacturer Part Number=XRCGB16M000FXN00R0, Supplier 1=DigiKey, Supplier 2=LCSC, Supplier 3=Mouser, Supplier Part Number 2=C5222893, Supplier Part Number 3=81-XRCGB16M000FXN00R
X3: "25 MHz ±10ppm Crystal 8pF 50 Ohms 4-SMD, No Lead", Capacitance="8 pF", Frequency="25 MHz", Manufacturer="Abracon LLC", Supplier Part Number 1=535-13853-1-ND, ComponentLink1Description=Datasheet, ComponentLink1URL=https://abracon.com/Resonators/ABM11W.pdf, Manufacturer Part Number=ABM11W-25.0000MHZ-8-D1X-T3, Supplier 1=DigiKey, Supplier 2=LCSC, Supplier 3=Mouser, Supplier Part Number 2=C1985767, Supplier Part Number 3=815-11W25-8D1XT
MH1 MH2 MH3 MH4 MH5 MH6 MH7 MH8 MH9 MH10 MH11 MH12 MH13 MH14: Manufacturer Part Number=HOLE_M3

## Via types
v1: diameter 0.5, hole 0.3, L1 to L4, 1524 vias
v2: diameter 0.65, hole 0.3, L1 to L4, 10 vias
v3: diameter 0.9, hole 0.6, L1 to L4, 8 vias

## Nets (pads, with @x,y where several pads share a name; then routed paths per layer and width w, separated by ;. In a path a pad name is that pad's centre, name@x,y a point inside that pad or via, vN(x,y) a via of type N, cw(c..) or ccw(c..) an arc to the next point about the centre after c; other vN are vias at no path point)
3P3: C4.1 C5.1 C6A.1 C6B.1 C7.1 C8.1 C9.1 C19.1 C25A.1 C25B.1 C25C.1 C25D.1 C25E.1 C25F.1 C25G.1 C25H.1 C25I.1 C25J.1 C25K.1 C25L.1 C25M.1 C25N.1 C25O.1 C25P.1 C49.1 D1.2 FB1.2 FB3.1 L1.2 R8.1 R20.2 R21.2 R30.1 R34.2 R49.2 R52.2 R54.2 R83.1 S3.2 TP35.1 U1.1 U1.19 U1.32 U1.48 U1.64 U4A.1 U4A.7 U4B.1 U4B.7 U4C.1 U4C.7 U4D.1 U4D.7 U4E.1 U4E.7 U4F.1 U4F.7 U4G.1 U4G.7 U4H.1 U4H.7 U4I.1 U4I.7 U4J.1 U4J.7 U4K.1 U4K.7 U4L.1 U4L.7 U4M.1 U4M.7 U4N.1 U4N.7 U4O.1 U4O.7 U4P.1 U4P.7 U7.9 U9A.24 U9B.21 U9B.24 | length 143.2
  L1 w0.2: C25P.1@120.4,90.5 v1(120.4,89.8) 121.33,89.8 U4P.1@121.43,89.7 ; U4P.7@125.24,89.7 125.24,90.94 125.5,91.2 v1(126.7,91.2) ; C25O.1@143.4,90.5 v1(143.4,89.8) 144.33,89.8 U4O.1@144.43,89.7 ; U4O.7@148.24,89.7 148.24,90.94 148.5,91.2 v1(149.7,91.2) ; C25N.1@166.4,90.5 v1(166.4,89.8) 167.33,89.8 U4N.1@167.43,89.7 ; U4N.7@171.24,89.7 171.24,90.94 171.5,91.2 v1(172.7,91.2) ; C25M.1@189.4,90.5 v1(189.4,89.8) 190.33,89.8 U4M.1@190.43,89.7 ; U4M.7@194.24,89.7 194.24,90.94 194.5,91.2 v1(195.7,91.2) ; U9B.21@202.4,67.875 201.075,67.875 200.7,67.5 C6B.1@200.7,65.5 201.1,65.5 201.525,65.925 U9B.24@202.4,65.925 204.325,65.925 205.5,67.1 v1(205.5,80.9) ; C25L.1@212.4,90.5 v1(212.4,89.8) 213.33,89.8 U4L.1@213.43,89.7 ; U4L.7@217.24,89.7 217.24,90.94 217.5,91.2 v1(218.7,91.2) ; C25K.1@235.4,90.5 v1(235.4,89.8) 236.33,89.8 U4K.1@236.43,89.7 ; U4K.7@240.24,89.7 240.24,90.94 240.5,91.2 v1(241.7,91.2) ; C25J.1@258.4,90.5 v1(258.4,89.8) 259.33,89.8 U4J.1@259.43,89.7 ; U4J.7@263.24,89.7 263.24,90.94 263.5,91.2 v1(264.7,91.2) ; C25I.1@281.4,90.5 v1(281.4,89.8) 282.33,89.8 U4I.1@282.43,89.7 ; U4I.7@286.24,89.7 286.24,90.94 286.5,91.2 v1(287.7,91.2) ; C25H.1@304.4,90.5 v1(304.4,89.8) 305.33,89.8 U4H.1@305.43,89.7 ; U4H.7@309.24,89.7 309.24,90.94 309.5,91.2 v1(310.7,91.2) ; C25G.1@327.4,90.5 v1(327.4,89.8) 328.33,89.8 U4G.1@328.43,89.7 ; U4G.7@332.24,89.7 332.24,90.94 332.5,91.2 v1(333.7,91.2) ; C25F.1@350.4,90.5 v1(350.4,89.8) 351.33,89.8 U4F.1@351.43,89.7 ; U4F.7@355.24,89.7 355.24,90.94 355.5,91.2 v1(356.7,91.2) ; C25E.1@373.4,90.5 v1(373.4,89.8) 374.33,89.8 U4E.1@374.43,89.7 ; U4E.7@378.24,89.7 378.24,90.94 378.5,91.2 v1(379.7,91.2) ; C25D.1@396.4,90.5 v1(396.4,89.8) 397.33,89.8 U4D.1@397.43,89.7 ; U4D.7@401.24,89.7 401.24,90.94 401.5,91.2 v1(402.7,91.2) ; C6A.1@408.5,66.4 408.975,65.925 U9A.24@410,65.925 412.125,65.925 413.4,67.2 413.4,80.5 v1(413.7,80.8) ; C25C.1@419.4,90.5 v1(419.4,89.8) 420.33,89.8 U4C.1@420.43,89.7 ; U4C.7@424.24,89.7 424.24,90.94 424.5,91.2 v1(425.7,91.2) ; C25B.1@442.4,90.5 v1(442.4,89.8) 443.33,89.8 U4B.1@443.43,89.7 ; U4B.7@447.24,89.7 447.24,90.94 447.5,91.2 v1(448.7,91.2) ; C25A.1@465.4,90.5 v1(465.4,89.8) 466.33,89.8 U4A.1@466.43,89.7 ; U4A.7@470.24,89.7 470.24,90.94 470.5,91.2 v1(471.7,91.2) ; v1(479.5,128) S3.2@480.65,128 ; v1(480.8,83.7) R49.2@481.4,83.7 ; v1(480.905,79.705) 480.905,79.7 R21.2@481.5,79.7 ; v1(483.9,77.7) R54.2@484.5,77.7 ; v1(483.9,81.8) R34.2@484.5,81.8 ; C4.1@484.7,97.3 v1(485.3,97.3) 485.7,97.3 485.9,97.1 U1.19@486.7,97.1 ; C8.1@486.4,89.4 v1(486.4,90) 486.7,90.3 U1.32@486.7,90.6 ; C49.1@486.5,113.9 v1(487.1,113.9) 487.15,113.95 U7.9@487.95,113.95 ; FB1.2@487.8,101.95 R52.2@487.8,101.2 v1(488.5,101.2) ; v1(488.8,108.5) R83.1@488.8,109.1 ; v1(489.029,79.358) 489.038,79.35 D1.2@489.85,79.35 ; R30.1@493.6,103.3 v1(493.6,103.9) ; FB3.1@494.6,118.95 v1(494.6,119.6) ; U1.48@496.2,88.6 v1(496.8,88.6) 497.5,88.6 C5.1@497.525,88.575 ; U1.1@496.2,100.1 v1(496.2,101.1) C7.1@496.2,101.8 ; U1.64@498.2,98.1 498.2,98.6 v1(498.6,99) C9.1@499.8,99 ; L1.2@509.15,100.8 509.15,103.05 509.4,103.3 513.3,103.3 514,102.6 R8.1@515.4,102.6
  L1 w0.3: v1(522,124.8) R20.2@522,125.55
  other v1: 506.2,99 507.1,99 508,99 506.2,99.8
5P0: C32.1 C33.1 D2.1 L2.2 Q2A.4 Q2B.4 Q2C.4 Q2D.4 Q2E.4 Q2F.4 Q2G.4 Q2H.4 Q2I.4 Q2J.4 Q2K.4 Q2L.4 Q2M.4 Q2N.4 Q2O.4 Q2P.4 R14A.2 R14B.2 R14C.2 R14D.2 R14E.2 R14F.2 R14G.2 R14H.2 R14I.2 R14J.2 R14K.2 R14L.2 R14M.2 R14N.2 R14O.2 R14P.2 R25.2 TP33.1 | length 23.9
  L1 w0.2: v1(132.9,75.2) R14P.2@132.9,75.8 ; v1(155.9,75.2) R14O.2@155.9,75.8 ; v1(178.9,75.2) R14N.2@178.9,75.8 ; v1(201.9,75.2) R14M.2@201.9,75.8 ; v1(224.9,75.2) R14L.2@224.9,75.8 ; v1(247.9,75.2) R14K.2@247.9,75.8 ; v1(270.9,75.2) R14J.2@270.9,75.8 ; v1(293.9,75.2) R14I.2@293.9,75.8 ; v1(316.9,75.2) R14H.2@316.9,75.8 ; v1(339.9,75.2) R14G.2@339.9,75.8 ; v1(362.9,75.2) R14F.2@362.9,75.8 ; v1(385.9,75.2) R14E.2@385.9,75.8 ; v1(408.9,75.2) R14D.2@408.9,75.8 ; v1(431.9,75.2) R14C.2@431.9,75.8 ; v1(454.9,75.2) R14B.2@454.9,75.8 ; v1(477.9,75.2) R14A.2@477.9,75.8 ; R25.2@498.6,76 v1(498.6,76.7)
  L1 w0.5: Q2P.4@132.85,80.525 133.575,80.525 v1(133.6,80.5) ; Q2O.4@155.85,80.525 156.575,80.525 v1(156.6,80.5) ; Q2N.4@178.85,80.525 179.575,80.525 v1(179.6,80.5) ; Q2M.4@201.85,80.525 202.575,80.525 v1(202.6,80.5) ; Q2L.4@224.85,80.525 225.575,80.525 v1(225.6,80.5) ; Q2K.4@247.85,80.525 248.575,80.525 v1(248.6,80.5) ; Q2J.4@270.85,80.525 271.575,80.525 v1(271.6,80.5) ; Q2I.4@293.85,80.525 294.575,80.525 v1(294.6,80.5) ; Q2H.4@316.85,80.525 317.575,80.525 v1(317.6,80.5) ; Q2G.4@339.85,80.525 340.575,80.525 v1(340.6,80.5) ; Q2F.4@362.85,80.525 363.575,80.525 v1(363.6,80.5) ; Q2E.4@385.85,80.525 386.575,80.525 v1(386.6,80.5) ; Q2D.4@408.85,80.525 409.575,80.525 v1(409.6,80.5) ; Q2C.4@431.85,80.525 432.575,80.525 v1(432.6,80.5) ; Q2B.4@454.85,80.525 455.575,80.525 v1(455.6,80.5) ; Q2A.4@477.85,80.525 478.575,80.525 v1(478.6,80.5) ; v1(500.1,77.3) D2.1@501.55,77.3
  other v1: 479.8,69.4 480.6,69.4 481.4,69.4 482.2,69.4 483,69.4 483.8,69.4 484.6,69.4 485.4,69.4 486.2,69.4
BIASA: C20A.1 C23A.1 C24A.1 C26A.1 Q1A.4 R44A.2 U3A.5 U4A.10 U4A.16 U5A.1 U6A.5 | length 9
  L1 w0.2: C26A.1@465.4,94.4 v1@465.4,95.227 ; 465.8,95.1 U4A.16@466.43,95.1 ; U5A.1@469.847,98.275 469.847,97.948 469.7,97.8 C24A.1@469.7,97.2 469.8,97.1 v1(469.8,96.6) 470.24,96.16 U4A.10@470.24,95.1 ; v1(472.3,98.1) C20A.1@472.3,97.5 473.2,97.5 473.35,97.65 U3A.5@473.35,98.2 ; C23A.1@473.5,91.05 473.523,91.073 v1(474.585,91.073) v1@474.563,91.05 ; v1(475.5,91.5) R44A.2@476.2,91.5
  other v1: 463,86.5 464,86.5 463,87.5 464,87.5 463,88.5 464,88.5 465.4,95.3 463,103.5 464,103.5 465,103.5 463,104.5 464,104.5 465,104.5 463,105.5 464,105.5 465,105.5 463,106.5 464,106.5 465,106.5 463,107.5 464,107.5 465,107.5 463,108.5 464,108.5 465,108.5 463,109.5 464,109.5 465,109.5
BIASB: C20B.1 C23B.1 C24B.1 C26B.1 Q1B.4 R44B.2 U3B.5 U4B.10 U4B.16 U5B.1 U6B.5 | length 9
  L1 w0.2: C26B.1@442.4,94.4 v1@442.4,95.227 ; 442.8,95.1 U4B.16@443.43,95.1 ; U5B.1@446.847,98.275 446.847,97.948 446.7,97.8 C24B.1@446.7,97.2 446.8,97.1 v1(446.8,96.6) 447.24,96.16 U4B.10@447.24,95.1 ; v1(449.3,98.1) C20B.1@449.3,97.5 450.2,97.5 450.35,97.65 U3B.5@450.35,98.2 ; C23B.1@450.5,91.05 450.523,91.073 v1(451.585,91.073) v1@451.563,91.05 ; v1(452.5,91.5) R44B.2@453.2,91.5
  other v1: 440,86.5 441,86.5 440,87.5 441,87.5 440,88.5 441,88.5 442.4,95.3 440,103.5 441,103.5 442,103.5 440,104.5 441,104.5 442,104.5 440,105.5 441,105.5 442,105.5 440,106.5 441,106.5 442,106.5 440,107.5 441,107.5 442,107.5 440,108.5 441,108.5 442,108.5 440,109.5 441,109.5 442,109.5
BIASC: C20C.1 C23C.1 C24C.1 C26C.1 Q1C.4 R44C.2 U3C.5 U4C.10 U4C.16 U5C.1 U6C.5 | length 9
  L1 w0.2: C26C.1@419.4,94.4 v1@419.4,95.227 ; 419.8,95.1 U4C.16@420.43,95.1 ; U5C.1@423.847,98.275 423.847,97.948 423.7,97.8 C24C.1@423.7,97.2 423.8,97.1 v1(423.8,96.6) 424.24,96.16 U4C.10@424.24,95.1 ; v1(426.3,98.1) C20C.1@426.3,97.5 427.2,97.5 427.35,97.65 U3C.5@427.35,98.2 ; C23C.1@427.5,91.05 427.523,91.073 v1(428.585,91.073) v1@428.563,91.05 ; v1(429.5,91.5) R44C.2@430.2,91.5
  other v1: 417,86.5 418,86.5 417,87.5 418,87.5 417,88.5 418,88.5 419.4,95.3 417,103.5 418,103.5 419,103.5 417,104.5 418,104.5 419,104.5 417,105.5 418,105.5 419,105.5 417,106.5 418,106.5 419,106.5 417,107.5 418,107.5 419,107.5 417,108.5 418,108.5 419,108.5 417,109.5 418,109.5 419,109.5
BIASD: C20D.1 C23D.1 C24D.1 C26D.1 Q1D.4 R44D.2 U3D.5 U4D.10 U4D.16 U5D.1 U6D.5 | length 9
  L1 w0.2: C26D.1@396.4,94.4 v1@396.4,95.227 ; 396.8,95.1 U4D.16@397.43,95.1 ; U5D.1@400.847,98.275 400.847,97.948 400.7,97.8 C24D.1@400.7,97.2 400.8,97.1 v1(400.8,96.6) 401.24,96.16 U4D.10@401.24,95.1 ; v1(403.3,98.1) C20D.1@403.3,97.5 404.2,97.5 404.35,97.65 U3D.5@404.35,98.2 ; C23D.1@404.5,91.05 404.523,91.073 v1(405.585,91.073) v1@405.563,91.05 ; v1(406.5,91.5) R44D.2@407.2,91.5
  other v1: 394,86.5 395,86.5 394,87.5 395,87.5 394,88.5 395,88.5 396.4,95.3 394,103.5 395,103.5 396,103.5 394,104.5 395,104.5 396,104.5 394,105.5 395,105.5 396,105.5 394,106.5 395,106.5 396,106.5 394,107.5 395,107.5 396,107.5 394,108.5 395,108.5 396,108.5 394,109.5 395,109.5 396,109.5
BIASE: C20E.1 C23E.1 C24E.1 C26E.1 Q1E.4 R44E.2 U3E.5 U4E.10 U4E.16 U5E.1 U6E.5 | length 9
  L1 w0.2: C26E.1@373.4,94.4 v1@373.4,95.227 ; 373.8,95.1 U4E.16@374.43,95.1 ; U5E.1@377.847,98.275 377.847,97.948 377.7,97.8 C24E.1@377.7,97.2 377.8,97.1 v1(377.8,96.6) 378.24,96.16 U4E.10@378.24,95.1 ; v1(380.3,98.1) C20E.1@380.3,97.5 381.2,97.5 381.35,97.65 U3E.5@381.35,98.2 ; C23E.1@381.5,91.05 381.523,91.073 v1(382.585,91.073) v1@382.563,91.05 ; v1(383.5,91.5) R44E.2@384.2,91.5
  other v1: 371,86.5 372,86.5 371,87.5 372,87.5 371,88.5 372,88.5 373.4,95.3 371,103.5 372,103.5 373,103.5 371,104.5 372,104.5 373,104.5 371,105.5 372,105.5 373,105.5 371,106.5 372,106.5 373,106.5 371,107.5 372,107.5 373,107.5 371,108.5 372,108.5 373,108.5 371,109.5 372,109.5 373,109.5
BIASF: C20F.1 C23F.1 C24F.1 C26F.1 Q1F.4 R44F.2 U3F.5 U4F.10 U4F.16 U5F.1 U6F.5 | length 9
  L1 w0.2: C26F.1@350.4,94.4 v1@350.4,95.227 ; 350.8,95.1 U4F.16@351.43,95.1 ; U5F.1@354.847,98.275 354.847,97.948 354.7,97.8 C24F.1@354.7,97.2 354.8,97.1 v1(354.8,96.6) 355.24,96.16 U4F.10@355.24,95.1 ; v1(357.3,98.1) C20F.1@357.3,97.5 358.2,97.5 358.35,97.65 U3F.5@358.35,98.2 ; C23F.1@358.5,91.05 358.523,91.073 v1(359.585,91.073) v1@359.563,91.05 ; v1(360.5,91.5) R44F.2@361.2,91.5
  other v1: 348,86.5 349,86.5 348,87.5 349,87.5 348,88.5 349,88.5 350.4,95.3 348,103.5 349,103.5 350,103.5 348,104.5 349,104.5 350,104.5 348,105.5 349,105.5 350,105.5 348,106.5 349,106.5 350,106.5 348,107.5 349,107.5 350,107.5 348,108.5 349,108.5 350,108.5 348,109.5 349,109.5 350,109.5
BIASG: C20G.1 C23G.1 C24G.1 C26G.1 Q1G.4 R44G.2 U3G.5 U4G.10 U4G.16 U5G.1 U6G.5 | length 9
  L1 w0.2: C26G.1@327.4,94.4 v1@327.4,95.227 ; 327.8,95.1 U4G.16@328.43,95.1 ; U5G.1@331.847,98.275 331.847,97.948 331.7,97.8 C24G.1@331.7,97.2 331.8,97.1 v1(331.8,96.6) 332.24,96.16 U4G.10@332.24,95.1 ; v1(334.3,98.1) C20G.1@334.3,97.5 335.2,97.5 335.35,97.65 U3G.5@335.35,98.2 ; C23G.1@335.5,91.05 335.523,91.073 v1(336.585,91.073) v1@336.563,91.05 ; v1(337.5,91.5) R44G.2@338.2,91.5
  other v1: 325,86.5 326,86.5 325,87.5 326,87.5 325,88.5 326,88.5 327.4,95.3 325,103.5 326,103.5 327,103.5 325,104.5 326,104.5 327,104.5 325,105.5 326,105.5 327,105.5 325,106.5 326,106.5 327,106.5 325,107.5 326,107.5 327,107.5 325,108.5 326,108.5 327,108.5 325,109.5 326,109.5 327,109.5
BIASH: C20H.1 C23H.1 C24H.1 C26H.1 Q1H.4 R44H.2 U3H.5 U4H.10 U4H.16 U5H.1 U6H.5 | length 9
  L1 w0.2: C26H.1@304.4,94.4 v1@304.4,95.227 ; 304.8,95.1 U4H.16@305.43,95.1 ; U5H.1@308.847,98.275 308.847,97.948 308.7,97.8 C24H.1@308.7,97.2 308.8,97.1 v1(308.8,96.6) 309.24,96.16 U4H.10@309.24,95.1 ; v1(311.3,98.1) C20H.1@311.3,97.5 312.2,97.5 312.35,97.65 U3H.5@312.35,98.2 ; C23H.1@312.5,91.05 312.523,91.073 v1(313.585,91.073) v1@313.563,91.05 ; v1(314.5,91.5) R44H.2@315.2,91.5
  other v1: 302,86.5 303,86.5 302,87.5 303,87.5 302,88.5 303,88.5 304.4,95.3 302,103.5 303,103.5 304,103.5 302,104.5 303,104.5 304,104.5 302,105.5 303,105.5 304,105.5 302,106.5 303,106.5 304,106.5 302,107.5 303,107.5 304,107.5 302,108.5 303,108.5 304,108.5 302,109.5 303,109.5 304,109.5
BIASI: C20I.1 C23I.1 C24I.1 C26I.1 Q1I.4 R44I.2 U3I.5 U4I.10 U4I.16 U5I.1 U6I.5 | length 9
  L1 w0.2: C26I.1@281.4,94.4 v1@281.4,95.227 ; 281.8,95.1 U4I.16@282.43,95.1 ; U5I.1@285.847,98.275 285.847,97.948 285.7,97.8 C24I.1@285.7,97.2 285.8,97.1 v1(285.8,96.6) 286.24,96.16 U4I.10@286.24,95.1 ; v1(288.3,98.1) C20I.1@288.3,97.5 289.2,97.5 289.35,97.65 U3I.5@289.35,98.2 ; C23I.1@289.5,91.05 289.523,91.073 v1(290.585,91.073) v1@290.563,91.05 ; v1(291.5,91.5) R44I.2@292.2,91.5
  other v1: 279,86.5 280,86.5 279,87.5 280,87.5 279,88.5 280,88.5 281.4,95.3 279,103.5 280,103.5 281,103.5 279,104.5 280,104.5 281,104.5 279,105.5 280,105.5 281,105.5 279,106.5 280,106.5 281,106.5 279,107.5 280,107.5 281,107.5 279,108.5 280,108.5 281,108.5 279,109.5 280,109.5 281,109.5
BIASJ: C20J.1 C23J.1 C24J.1 C26J.1 Q1J.4 R44J.2 U3J.5 U4J.10 U4J.16 U5J.1 U6J.5 | length 9
  L1 w0.2: C26J.1@258.4,94.4 v1@258.4,95.227 ; 258.8,95.1 U4J.16@259.43,95.1 ; U5J.1@262.847,98.275 262.847,97.948 262.7,97.8 C24J.1@262.7,97.2 262.8,97.1 v1(262.8,96.6) 263.24,96.16 U4J.10@263.24,95.1 ; v1(265.3,98.1) C20J.1@265.3,97.5 266.2,97.5 266.35,97.65 U3J.5@266.35,98.2 ; C23J.1@266.5,91.05 266.523,91.073 v1(267.585,91.073) v1@267.563,91.05 ; v1(268.5,91.5) R44J.2@269.2,91.5
  other v1: 256,86.5 257,86.5 256,87.5 257,87.5 256,88.5 257,88.5 258.4,95.3 256,103.5 257,103.5 258,103.5 256,104.5 257,104.5 258,104.5 256,105.5 257,105.5 258,105.5 256,106.5 257,106.5 258,106.5 256,107.5 257,107.5 258,107.5 256,108.5 257,108.5 258,108.5 256,109.5 257,109.5 258,109.5
BIASK: C20K.1 C23K.1 C24K.1 C26K.1 Q1K.4 R44K.2 U3K.5 U4K.10 U4K.16 U5K.1 U6K.5 | length 9